# Altium PCB MEMC_FFC.PcbDoc
Units mil, origin at the board's own origin, x right, y up, seen from the top; angles counter-clockwise.
Board outline 940 x 940 mil, 2 copper layers (Top Layer, Bottom Layer), stack 61.811 mil thick; 7 components, 56 nets, 133 pads, 78 vias.
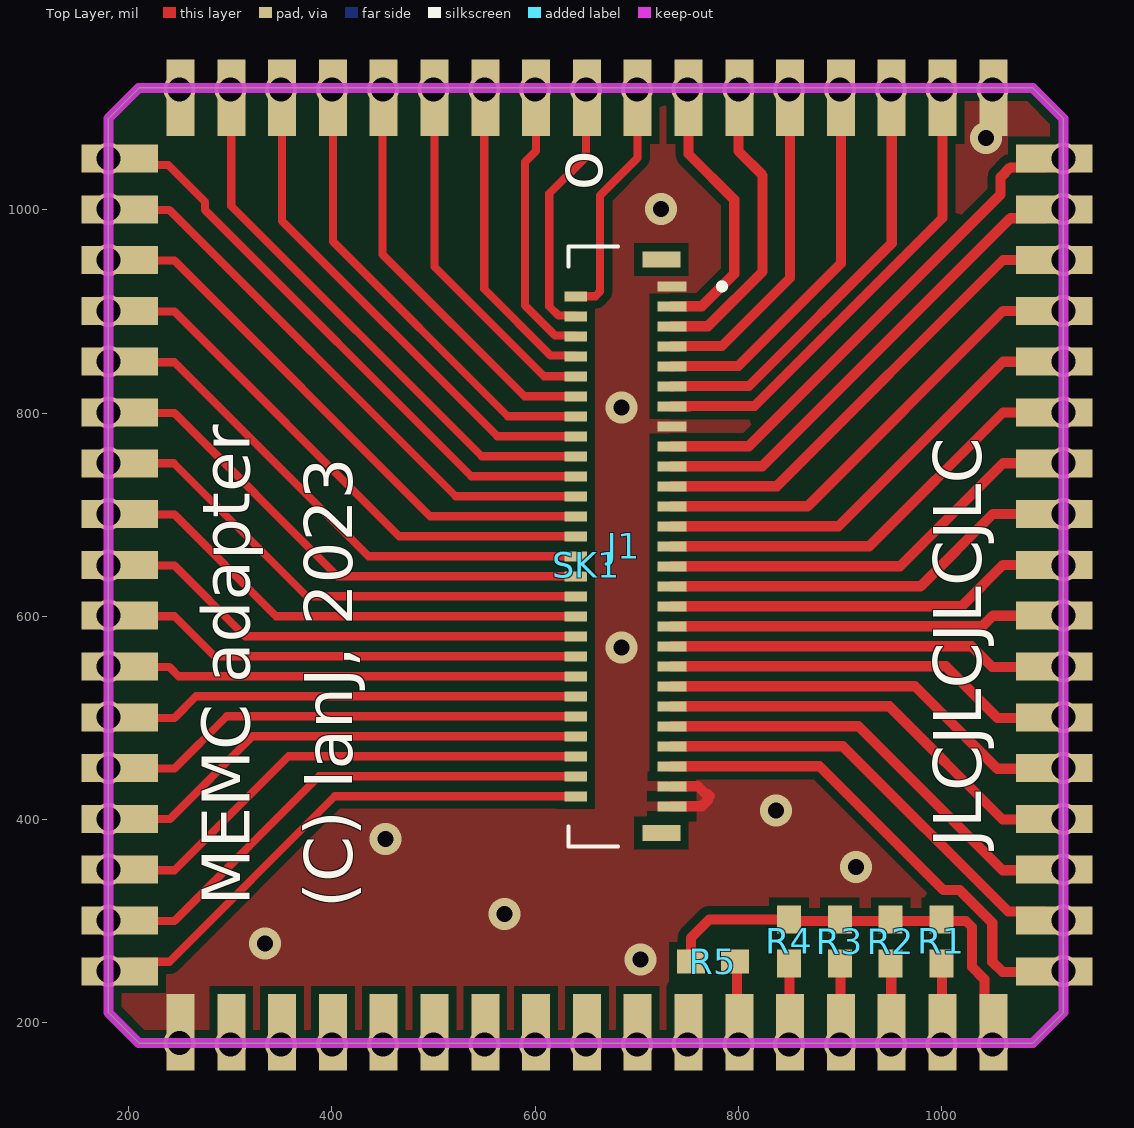
[diagram p0: Top Layer view]
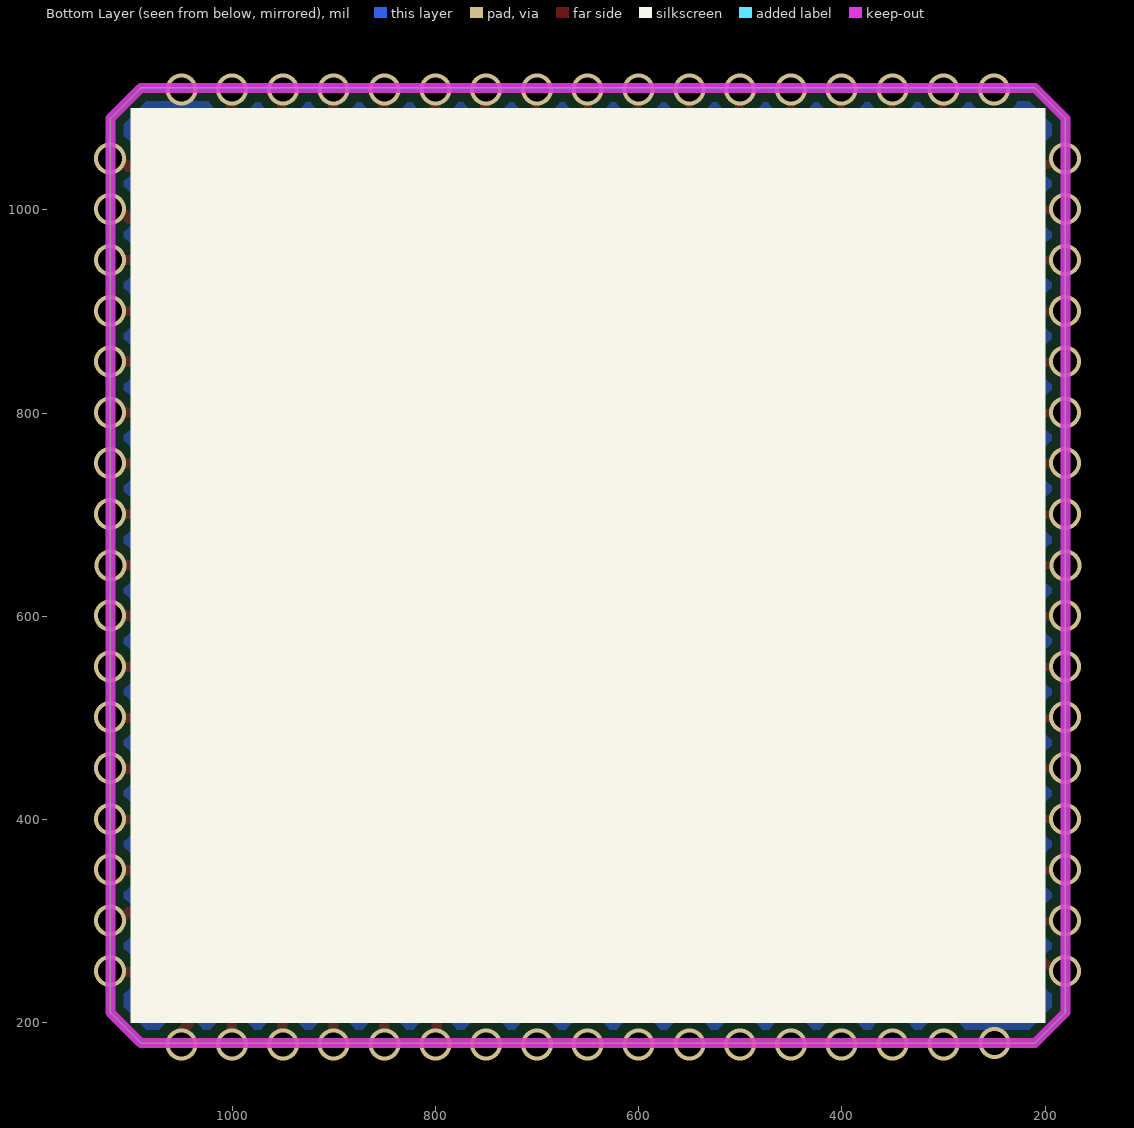
[diagram p1: Bottom Layer view, seen from below]
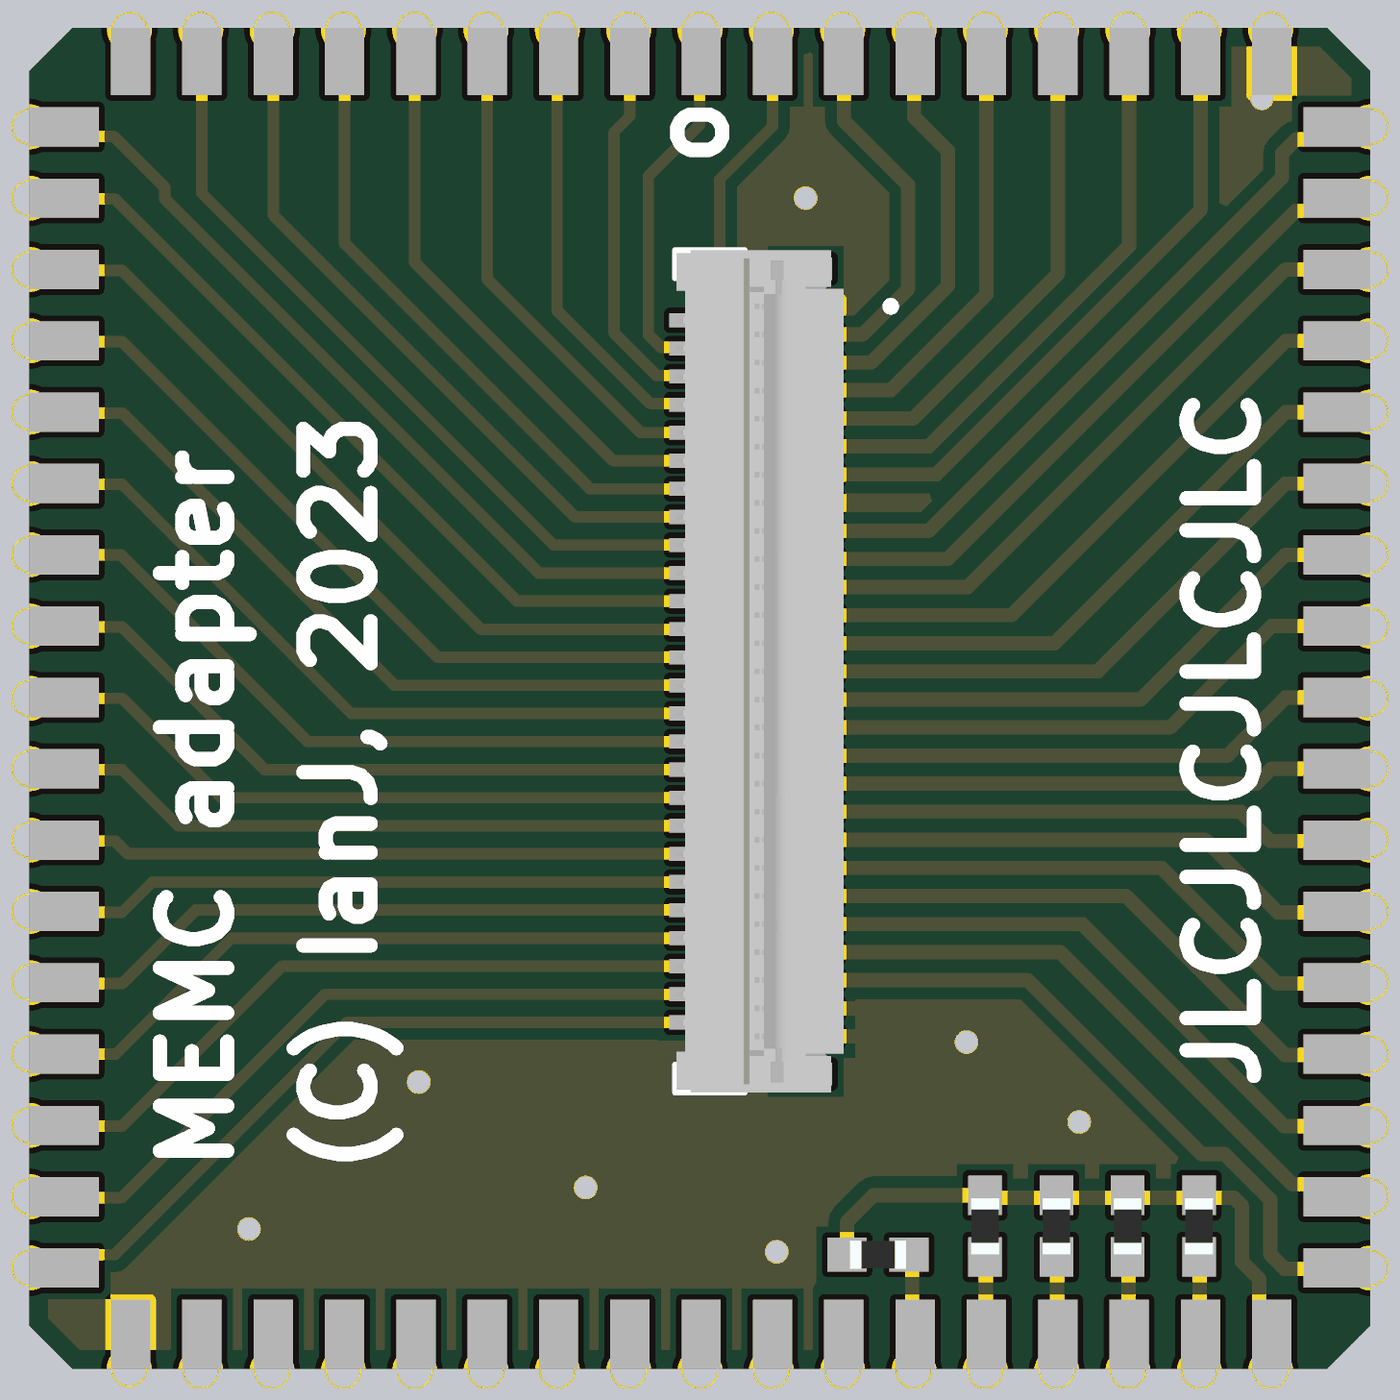
[diagram p2: 3D render of the assembled board from above, using the file's embedded part models]

## Layer stack, top to bottom
Top Solder: solder mask 0.4, Solder Resist, Dk 3.5
Top Layer: signal copper 1.378
Dielectric 2: prepreg 7.874, PP-006, Dk 4.1
Dielectric 1: dielectric 43.307, FR-4, Dk 4.8
Dielectric 3: prepreg 7.874, PP-006, Dk 4.1
Bottom Layer: signal copper 1.378
Bottom Solder: solder mask 0.4, Solder Resist, Dk 3.5

## Board outline
1120,1090 1090,1120 210,1120 180,1090 180,210 210,180 1090,180 1120,210

## Design rules (kind name [scope] priority, off if disabled: settings)
Clearance [All] p1: gap=8 ignorepadtopadclearanceinfootprint=FALSE except(0: Arc-Hole Track-Hole SMDPad-Hole THPad-Hole Via-Hole Fill-Hole Poly-Hole Region-Hole Text-Hole; 5: Arc-Arc Arc-Track Arc-THPad Track-Track Track-THPad; 10: Arc-Text Track-Text SMDPad-THPad SMDPad-Text THPad-THPad THPad-Via THPad-Fill THPad-Poly THPad-Region THPad-Text Via-Via Via-Fill Via-Poly Via-Region Via-Text Fill-Text Poly-Text Region-Text Text-Text)
ComponentClearance [All] p1: gap=5 collisioncheckmode=3 verticalgap=10 showdistances=FALSE
MinimumSolderMaskSliver [All] p1: minsoldermaskwidth=1
PolygonConnect [All] p1: connectstyle=Direct reliefconductorwidth=10 reliefentries=4 polygonreliefangle="90 Angle" airgapwidth=10
RoutingVias [All] p1: holewidth=28 width=50 viastyle="Through Hole" minholewidth=28 minwidth=50 maxholewidth=28 maxwidth=50
SolderMaskExpansion [All] p1: expansion=4 istentingtop=FALSE
Width [All] p1: maxlimit=10 minlimit=5 preferedwidth=10 minimp=50.000000 maximp=50.000000 favimp=50.000000
28 further rules are at their usual default settings.

## Components (designator, comment, footprint, x,y, rotation, side; value= is the part's Value field where it differs from the comment)
J1 "502078-5362 FFC" 5020785362 691.38,668.9 r90 top
R1 "10K" RESC1005X40N 1000,280 r270 top
R2 "10K" RESC1005X40N 950,280 r270 top
R3 "10K" RESC1005X40N 900,280 r270 top
R4 "10K" RESC1005X40N 850,280 r270 top
R5 "10K" RESC1005X40N 775,260 r0 top
SK1 "Virtual MEMC" 846821B1RKTR 651,650.59 r0 top

## Footprints (in the part's own frame and the unit in brackets; to place one, negate y for a bottom-side part, rotate by r counter-clockwise, add the part's x,y. Pads: shape width x height; smd on the part's side, far side on the other; paste and mask are expansions set on the pad)
846821B1RKTR [mm]
  rect 0.7x1.91 smd: 1(0,11.68) 2(-1.27,11.68) 3(-2.54,11.68) 4(-3.81,11.68) 5(-5.08,11.68) 6(-6.35,11.68) 7(-7.62,11.68) 8(-8.89,11.68) 9(-10.16,11.68) 27(-10.16,-11.68) 28(-8.89,-11.68) 29(-7.62,-11.68) 30(-6.35,-11.68) 31(-5.08,-11.68) 32(-3.81,-11.68) 33(-2.54,-11.68) 34(-1.27,-11.68) 35(0,-11.68) 36(1.27,-11.68) 37(2.54,-11.68) 38(3.81,-11.68) 39(5.08,-11.68) 40(6.35,-11.68) 41(7.62,-11.68) 42(8.89,-11.68) 43(10.16,-11.68) 61(10.16,11.68) 62(8.89,11.68) 63(7.62,11.68) 64(6.35,11.68) 65(5.08,11.68) 66(3.81,11.68) 67(2.54,11.68) 68(1.27,11.68)
  rect 1.91x0.7 smd: 10(-11.68,10.16) 11(-11.68,8.89) 12(-11.68,7.62) 13(-11.68,6.35) 14(-11.68,5.08) 15(-11.68,3.81) 16(-11.68,2.54) 17(-11.68,1.27) 18(-11.68,0) 19(-11.68,-1.27) 20(-11.68,-2.54) 21(-11.68,-3.81) 22(-11.68,-5.08) 23(-11.68,-6.35) 24(-11.68,-7.62) 25(-11.68,-8.89) 26(-11.68,-10.16) 44(11.68,-10.16) 45(11.68,-8.89) 46(11.68,-7.62) 47(11.68,-6.35) 48(11.68,-5.08) 49(11.68,-3.81) 50(11.68,-2.54) 51(11.68,-1.27) 52(11.68,0) 53(11.68,1.27) 54(11.68,2.54) 55(11.68,3.81) 56(11.68,5.08) 57(11.68,6.35) 58(11.68,7.62) 59(11.68,8.89) 60(11.68,10.16)
5020785362 [mm]
  rect 0.25x0.72 smd: 1(6.5,-1.1) 3(6,-1.1) 5(5.5,-1.1) 7(5,-1.1) 9(4.5,-1.1) 11(4,-1.1) 13(3.5,-1.1) 15(3,-1.1) 17(2.5,-1.1) 19(2,-1.1) 21(1.5,-1.1) 23(1,-1.1) 25(0.5,-1.1) 27(0,-1.1) 29(-0.5,-1.1) 31(-1,-1.1) 33(-1.5,-1.1) 35(-2,-1.1) 37(-2.5,-1.1) 39(-3,-1.1) 41(-3.5,-1.1) 43(-4,-1.1) 45(-4.5,-1.1) 47(-5,-1.1) 49(-5.5,-1.1) 51(-6,-1.1) 53(-6.5,-1.1)
  rect 0.25x0.57 smd: 2(6.25,1.305) 4(5.75,1.305) 6(5.25,1.305) 8(4.75,1.305) 10(4.25,1.305) 12(3.75,1.305) 14(3.25,1.305) 16(2.75,1.305) 18(2.25,1.305) 20(1.75,1.305) 22(1.25,1.305) 24(0.75,1.305) 26(0.25,1.305) 28(-0.25,1.305) 30(-0.75,1.305) 32(-1.25,1.305) 34(-1.75,1.305) 36(-2.25,1.305) 38(-2.75,1.305) 40(-3.25,1.305) 42(-3.75,1.305) 44(-4.25,1.305) 46(-4.75,1.305) 48(-5.25,1.305) 50(-5.75,1.305) 52(-6.25,1.305)
  rect 0.4x0.95 smd: MP1(7.17,-0.835) MP2(-7.17,-0.835)
  silkscreen extent -7.5,-2.4 7.5,1.49, body extent -7.5,-1.52 7.5,1.47, height 1
RESC1005X40N [mm]
  rect 0.7x0.6 smd: 1(-0.55,0) 2(0.55,0)
  body extent -0.5,-0.25 0.5,0.25, height 0.4

## Part data
J1: library part 502078-5362, "Connector", Manufacturer_Name=Molex, Mouser Part Number=538-502078-5362, Datasheet Link=https://componentsearchengine.com/Datasheets/1/502078-5362.pdf, Height=1.15mm, Manufacturer_Part_Number=502078-5362, Mouser Price/Stock=https://www.mouser.com/Search/Refine.aspx?Keyword=538-502078-5362
R1 R2 R3 R4 R5: library part CRCW040210K0FKEDHP, "Resistor", Manufacturer_Name=Vishay, Mouser Part Number=71-CRCW040210K0FKEDH, Arrow Part Number=CRCW040210K0FKEDHP, Arrow Price/Stock=https://www.arrow.com/en/products/crcw040210k0fkedhp/vishay?region=nac, Datasheet Link=http://www.vishay.com/docs/20035/dcrcwe3.pdf, Height=0.4mm, Manufacturer_Part_Number=CRCW040210K0FKEDHP, Mouser Price/Stock=https://www.mouser.co.uk/ProductDetail/Vishay-Dale/CRCW040210K0FKEDHP?qs=FlFvgi4rxBxmIiaeyFjrkA%3D%3D
SK1: library part MEMC_Skt, "MEMC socket", Arrow Part Number=8468-21B1-RK-TR, Manufacturer_Name=3M, Mouser Part Number=517-8468-21B1-RK-TR, Arrow Price/Stock=https://www.arrow.com/en/products/8468-21b1-rk-tr/3m, Datasheet Link=https://www.arrow.com/en/products/8468-21b1-rk-tr/3m, Height=4.6mm, Manufacturer_Part_Number=8468-21B1-RK-TR, Mouser Price/Stock=https://www.mouser.co.uk/ProductDetail/3M-Electronic-Solutions-Division/8468-21B1-RK-TR?qs=X%2F%2F06fXhnJ18zOj3KK47CQ%3D%3D

## Via types
v1: diameter 31.5, hole 23.62, Top Layer to Bottom Layer, 68 vias
v2: diameter 31.5, hole 15.75, Top Layer to Bottom Layer, tented both sides, 10 vias

## Nets (pads, with @x,y where several pads share a name; then routed paths per layer and width w, separated by ;. In a path a pad name is that pad's centre, name@x,y a point inside that pad or via, vN(x,y) a via of type N, cw(c..) or ccw(c..) an arc to the next point about the centre after c; other vN are vias at no path point)
A0: J1.52 SK1.26 | length 520.2
  Top Layer w8: SK1.26 200.57,260 240,260 402.83,422.83 J1.52
  other v1: 180.17,250.63
A1: J1.50 SK1.25 | length 508.1
  Top Layer w8: SK1.25 191.75,300 245,300 387.52,442.52 J1.50
  other v1: 180.17,300.63
A2: J1.48 SK1.24 | length 495.6
  Top Layer w8: SK1.24 191.75,350 245,350 357.2,462.2 J1.48
  other v1: 180.17,350.63
A3: J1.46 SK1.23 | length 482.5
  Top Layer w8: SK1.23 240.59,400.59 321.89,481.89 J1.46
  other v1: 180.17,400.63
A4: J1.44 SK1.22 | length 470.5
  Top Layer w8: SK1.22 191.75,450 245,450 296.57,501.57 J1.44
  other v1: 180.17,450.63
A5: J1.42 SK1.21 | length 457.9
  Top Layer w8: SK1.21 191.75,500 245,500 266.26,521.26 J1.42
  other v1: 180.17,500.63
A6: J1.40 SK1.20 | length 452.8
  Top Layer w8: SK1.20 191.75,550 240,550 249.06,540.94 J1.40
  other v1: 180.17,550.63
A7: J1.38 SK1.19 | length 465.4
  Top Layer w8: SK1.19 191.75,600 245,600 284.37,560.63 J1.38
  other v1: 180.17,600.63
A8: J1.36 SK1.18 | length 489.4
  Top Layer w8: v1(180,650) 190.57,650 SK1.18 191.75,650 245,650 314.69,580.31 J1.36
A9: J1.34 SK1.17 | length 490.5
  Top Layer w8: SK1.17 191.75,700 245,700 345,600 J1.34
  other v1: 180.17,700.63
A10: J1.32 SK1.16 | length 503.1
  Top Layer w8: SK1.16 244.41,750.59 375.31,619.68 J1.32
  other v1: 180.17,750.63
A11: J1.30 SK1.15 | length 515.6
  Top Layer w8: SK1.15 191.75,800 245,800 405.63,639.37 J1.30
  other v1: 180.17,800.63
A12: J1.28 SK1.14 | length 528.2
  Top Layer w8: SK1.14 191.75,850 245,850 435.94,659.06 J1.28
  other v1: 180.17,850.63
A13: J1.26 SK1.13 | length 540.7
  Top Layer w8: SK1.13 191.75,900 245,900 466.26,678.74 J1.26
  other v1: 180.17,900.63
A14: J1.24 SK1.12 | length 553.3
  Top Layer w8: SK1.12 191.75,950 245,950 496.57,698.43 J1.24
  other v1: 180.17,950.63
A15: J1.22 SK1.11 | length 565.8
  Top Layer w8: SK1.11 191.75,1000 240,1000 521.89,718.11 J1.22
  other v1: 180.17,1000.63
A16: J1.20 SK1.10 | length 583.1
  Top Layer w8: SK1.10 197.75,1044 239,1044 275,1008 275,1000 537.2,737.8 J1.20
  other v1: 180.17,1050.63
A17: J1.18 SK1.8 | length 547.5
  Top Layer w8: SK1.8 301,1004 547.52,757.48 J1.18
  other v1: 300.17,1118.63
A18: J1.16 SK1.7 | length 498.2
  Top Layer w8: SK1.7 351,989 562.83,777.17 J1.16
  other v1: 350.17,1118.63
A19: J1.14 SK1.6 | length 451.7
  Top Layer w8: SK1.6 401,969 573.15,796.85 J1.14
  other v1: 400.17,1118.63
A20: J1.12 SK1.5 | length 402.6
  Top Layer w8: SK1.5 450,1109.43 450,956 589.46,816.54 J1.12
  other v1: 450.17,1118.63
A21: J1.10 SK1.4 | length 350.1
  Top Layer w8: SK1.4 501,944 608.78,836.22 J1.10
  other v1: 500.17,1118.63
A22: J1.8 SK1.3 | length 306.2
  Top Layer w8: SK1.3 550,1109.43 550,922 615.33,856.67 639.24,856.67 J1.8
  other v1: 550.17,1118.63
A23: J1.6 SK1.2 | length 271.6
  Top Layer w8: SK1.2 601,1058 590,1047 590,906 619.65,876.35 639.24,876.35 J1.6
  other v1: 600.17,1118.63
A24: J1.4 SK1.1 | length 250.8
  Top Layer w8: J1.4 639.24,896.04 622.98,896.04 614,905.02 614,1016 650,1052 650,1109.43 SK1.1
  other v1: 650.17,1118.63
A25: J1.2 SK1.68 | length 232.1
  Top Layer w8: J1.2 659.31,914.96 664,919.65 664,1014 701,1051 SK1.68
  other v1: 700.17,1118.63
ABRT: J1.31 SK1.53 | length 405.6
  Top Layer w10: J1.31 979.53,629.53 1050.59,700.59 SK1.53
  other v1: 1120.17,700.63
CLK: J1.3 SK1.67 | length 266.6
  Top Layer w10: J1.3 764.12,905.12 796,937 796,1010 751,1055 SK1.67
  other v1: 750.17,1118.63
DBE: J1.25 SK1.56 | length 443.3
  Top Layer w10: J1.25 898.58,688.58 1060.59,850.59 SK1.56
  other v1: 1120.17,850.63
FLBK: J1.47 SK1.45 | length 447.2
  Top Layer w10: J1.47 755.31,472.05 785,472.05 902.95,472.05 1065.63,309.37 1102.06,309.37 SK1.45
  other v1: 1120.17,300.63
GND: J1.1 J1.15 J1.51 J1.53 SK1.27 SK1.61 | length 85.2
  Top Layer w10: J1.53 764.14,412.99 770,418.85 770,425 ; J1.51 760.32,432.68 768,425 770,425 ; 772,423 770,425
  other v1: 250,180 1050.17,1118.63
  other v2: 704,262 334,278 570,307 916,353 453,381 837,409 685.13,569.51 685.13,805.51 724.17,1000.63 1044.01,1070.65
nBW: J1.11 SK1.63 | length 418
  Top Layer w10: J1.11 734.92,826.61 795.25,826.61 810.61,826.61 951,967 951,982.36 SK1.63
  other v1: 950.17,1118.63
nCAS0: R4.2 SK1.39 | length 68
  Top Layer w10: R4.2 850.5,257.85 850.5,191.25 SK1.39
  other v1: 850.17,178.63
nCAS1: R3.2 SK1.40 | length 68
  Top Layer w10: R3.2 900.5,257.85 900.5,191.25 SK1.40
  other v1: 900.17,178.63
nCAS2: R2.2 SK1.41 | length 68
  Top Layer w10: R2.2 950.5,257.85 950.5,191.25 SK1.41
  other v1: 950.17,178.63
nCAS3: R1.2 SK1.42 | length 68
  Top Layer w10: R1.2 1000.5,257.85 1000.5,191.25 SK1.42
  other v1: 1000.17,178.63
nHSYC: J1.45 SK1.46 | length 435.1
  Top Layer w10: J1.45 918.27,491.73 1060,350 1110.25,350 SK1.46
  other v1: 1120.17,350.63
nIOGT: J1.21 SK1.58 | length 468.4
  Top Layer w10: J1.21 837.95,727.95 1060.59,950.59 SK1.58
  other v1: 1120.17,950.63
nIORQ: J1.19 SK1.59 | length 480.9
  Top Layer w10: J1.19 802.64,747.64 823.64,747.64 1067.81,991.81 1102.06,991.81 SK1.59
  other v1: 1120.17,1000.63
nMREQ: J1.27 SK1.55 | length 430.7
  Top Layer w10: J1.27 928.9,668.9 1060.59,800.59 SK1.55
  other v1: 1120.17,800.63
nRAS: R5.2 SK1.38 | length 71.1
  Top Layer w10: R5.2 798.83,257.83 798.83,192.92 SK1.38
  other v1: 800.17,178.63
nRMCS: J1.17 SK1.60 | length 503.4
  Top Layer w10: J1.17 797.32,767.32 810.32,767.32 1058.24,1015.24 1058.24,1032.24 1067.81,1041.81 1102.06,1041.81 SK1.60
  other v1: 1120.17,1050.63
nRW: J1.13 SK1.62 | length 461.5
  Top Layer w10: J1.13 751.69,806.69 751.93,806.93 796.78,806.93 815.93,806.93 1001,992 1001,1011.15 SK1.62
  other v1: 1000.17,1118.63
nSDAK: J1.39 SK1.49 | length 397.4
  Top Layer w10: J1.39 1004.21,550.79 1055,500 1110.25,500 SK1.49
  other v1: 1120.17,500.63
nSDRQ: J1.43 SK1.47 | length 422.6
  Top Layer w10: J1.43 948.58,511.42 1060,400 1110.25,400 SK1.47
  other v1: 1120.17,400.63
nSIRQ: J1.23 SK1.57 | length 455.8
  Top Layer w10: J1.23 868.27,708.27 1060.59,900.59 SK1.57
  other v1: 1120.17,900.63
nVDAK: J1.37 SK1.50 | length 384.9
  Top Layer w10: J1.37 1029.53,570.47 1050,550 1110.25,550 SK1.50
  other v1: 1120.17,550.63
nVDRQ: J1.41 SK1.48 | length 410
  Top Layer w10: J1.41 973.9,531.1 1055,450 1110.25,450 SK1.48
  other v1: 1120.17,450.63
nVIDW: J1.35 SK1.51 | length 380.5
  Top Layer w10: J1.35 1040.16,590.16 1050.59,600.59 SK1.51
  other v1: 1120.17,600.63
phi1: J1.5 SK1.66 | length 302.3
  Top Layer w10: J1.5 770,885.43 824,939.43 ; v1(800.17,1118.63) 800.17,1057.83 824,1034 824,939.43 ; 824,941 824,939.43
phi2: J1.7 SK1.65 | length 325.6
  Top Layer w10: J1.7 740.75,865.75 740.98,865.98 784,865.98 851,932.98 ; 851,937 851,932.98 ; SK1.65 851,932.98
  other v1: 850.17,1118.63
REF: J1.9 SK1.64 | length 371.4
  Top Layer w10: J1.9 734.92,846.3 800.01,846.3 901,947.29 SK1.64
  other v1: 900.17,1118.63
RES: J1.49 SK1.44 | length 482.8
  Top Layer w10: J1.49 880,452.36 1001.93,330.43 1018.02,330.43 1050,298.46 1050,260 1060,250 1110.25,250 SK1.44
  other v1: 1120.17,250.63
SEQ: J1.29 SK1.54 | length 418.1
  Top Layer w10: J1.29 959.21,649.21 1060.59,750.59 SK1.54
  other v1: 1120.17,750.63
SPMD: J1.33 SK1.52 | length 402.4
  Top Layer w10: J1.33 1019.84,609.84 1060.59,650.59 1119.41,650.59 v1(1120,650)
VCC: R1.1 R2.1 R3.1 R4.1 R5.1 SK1.43 | length 422.8
  Top Layer w10: R5.1 753.35,283.35 771.65,301.65 R4.1 851.65,300 1024.14,300 1030,294.14 1030,255 1042.22,242.78 1042.22,199.53 SK1.43
  other v1: 1050.17,178.63
pads on no net: J1.MP1 J1.MP2 SK1.9 SK1.28 SK1.29 SK1.30 SK1.31 SK1.32 SK1.33 SK1.34 SK1.35 SK1.36 SK1.37
copper on no net:
  other v1: 300.17,178.63 350.17,178.63 400.17,178.63 450.17,178.63 500.17,178.63 550.17,178.63 600.17,178.63 650.17,178.63 700.17,178.63 750.17,178.63 250.17,1118.63

## Polygon pours and split planes (outlines as drawn)
GND on Bottom Layer "NONET_L-01_P-001" (solid, pour order 1): 180,180 1120,180 1120,1120 180,1120
no net on Bottom Overlay "NONET_L-01_P-001" (solid): 200,200 1100,200 1100,1100 200,1100
GND on Top Layer "NONET_L-01_P-001" (solid, remove dead copper, pour order 0): 180,180 1120,180 1120,1120 180,1120

## Keep-outs
Keep-Out Layer:
  the board outline again, w10

## Silkscreen, mask and mechanical layers (free items; w line width, h text height)
Top Overlay:
  text "o" at 666.24,1018.93 h47.24 r90
  text "JLCJLCJLCJLC" at 1039,372 h47.24 r90
  text "MEMC adapter" at 319.26,315 h47.24 r90
  text "(C) IanJ, 2023" at 419.85,312.64 h47.24 r90